# Altium PCB Circular PCB.PcbDoc (part 4 of 4)
Units mm, origin at the board's own origin, x right, y up, seen from the top; angles counter-clockwise.
Board outline 100 x 100 mm, 6 copper layers (Top Layer, GND (Top), X, Y, GND (Bot), Bottom Layer), stack 1.599 mm thick; 185 components, 119 nets, 581 pads, 159 vias.
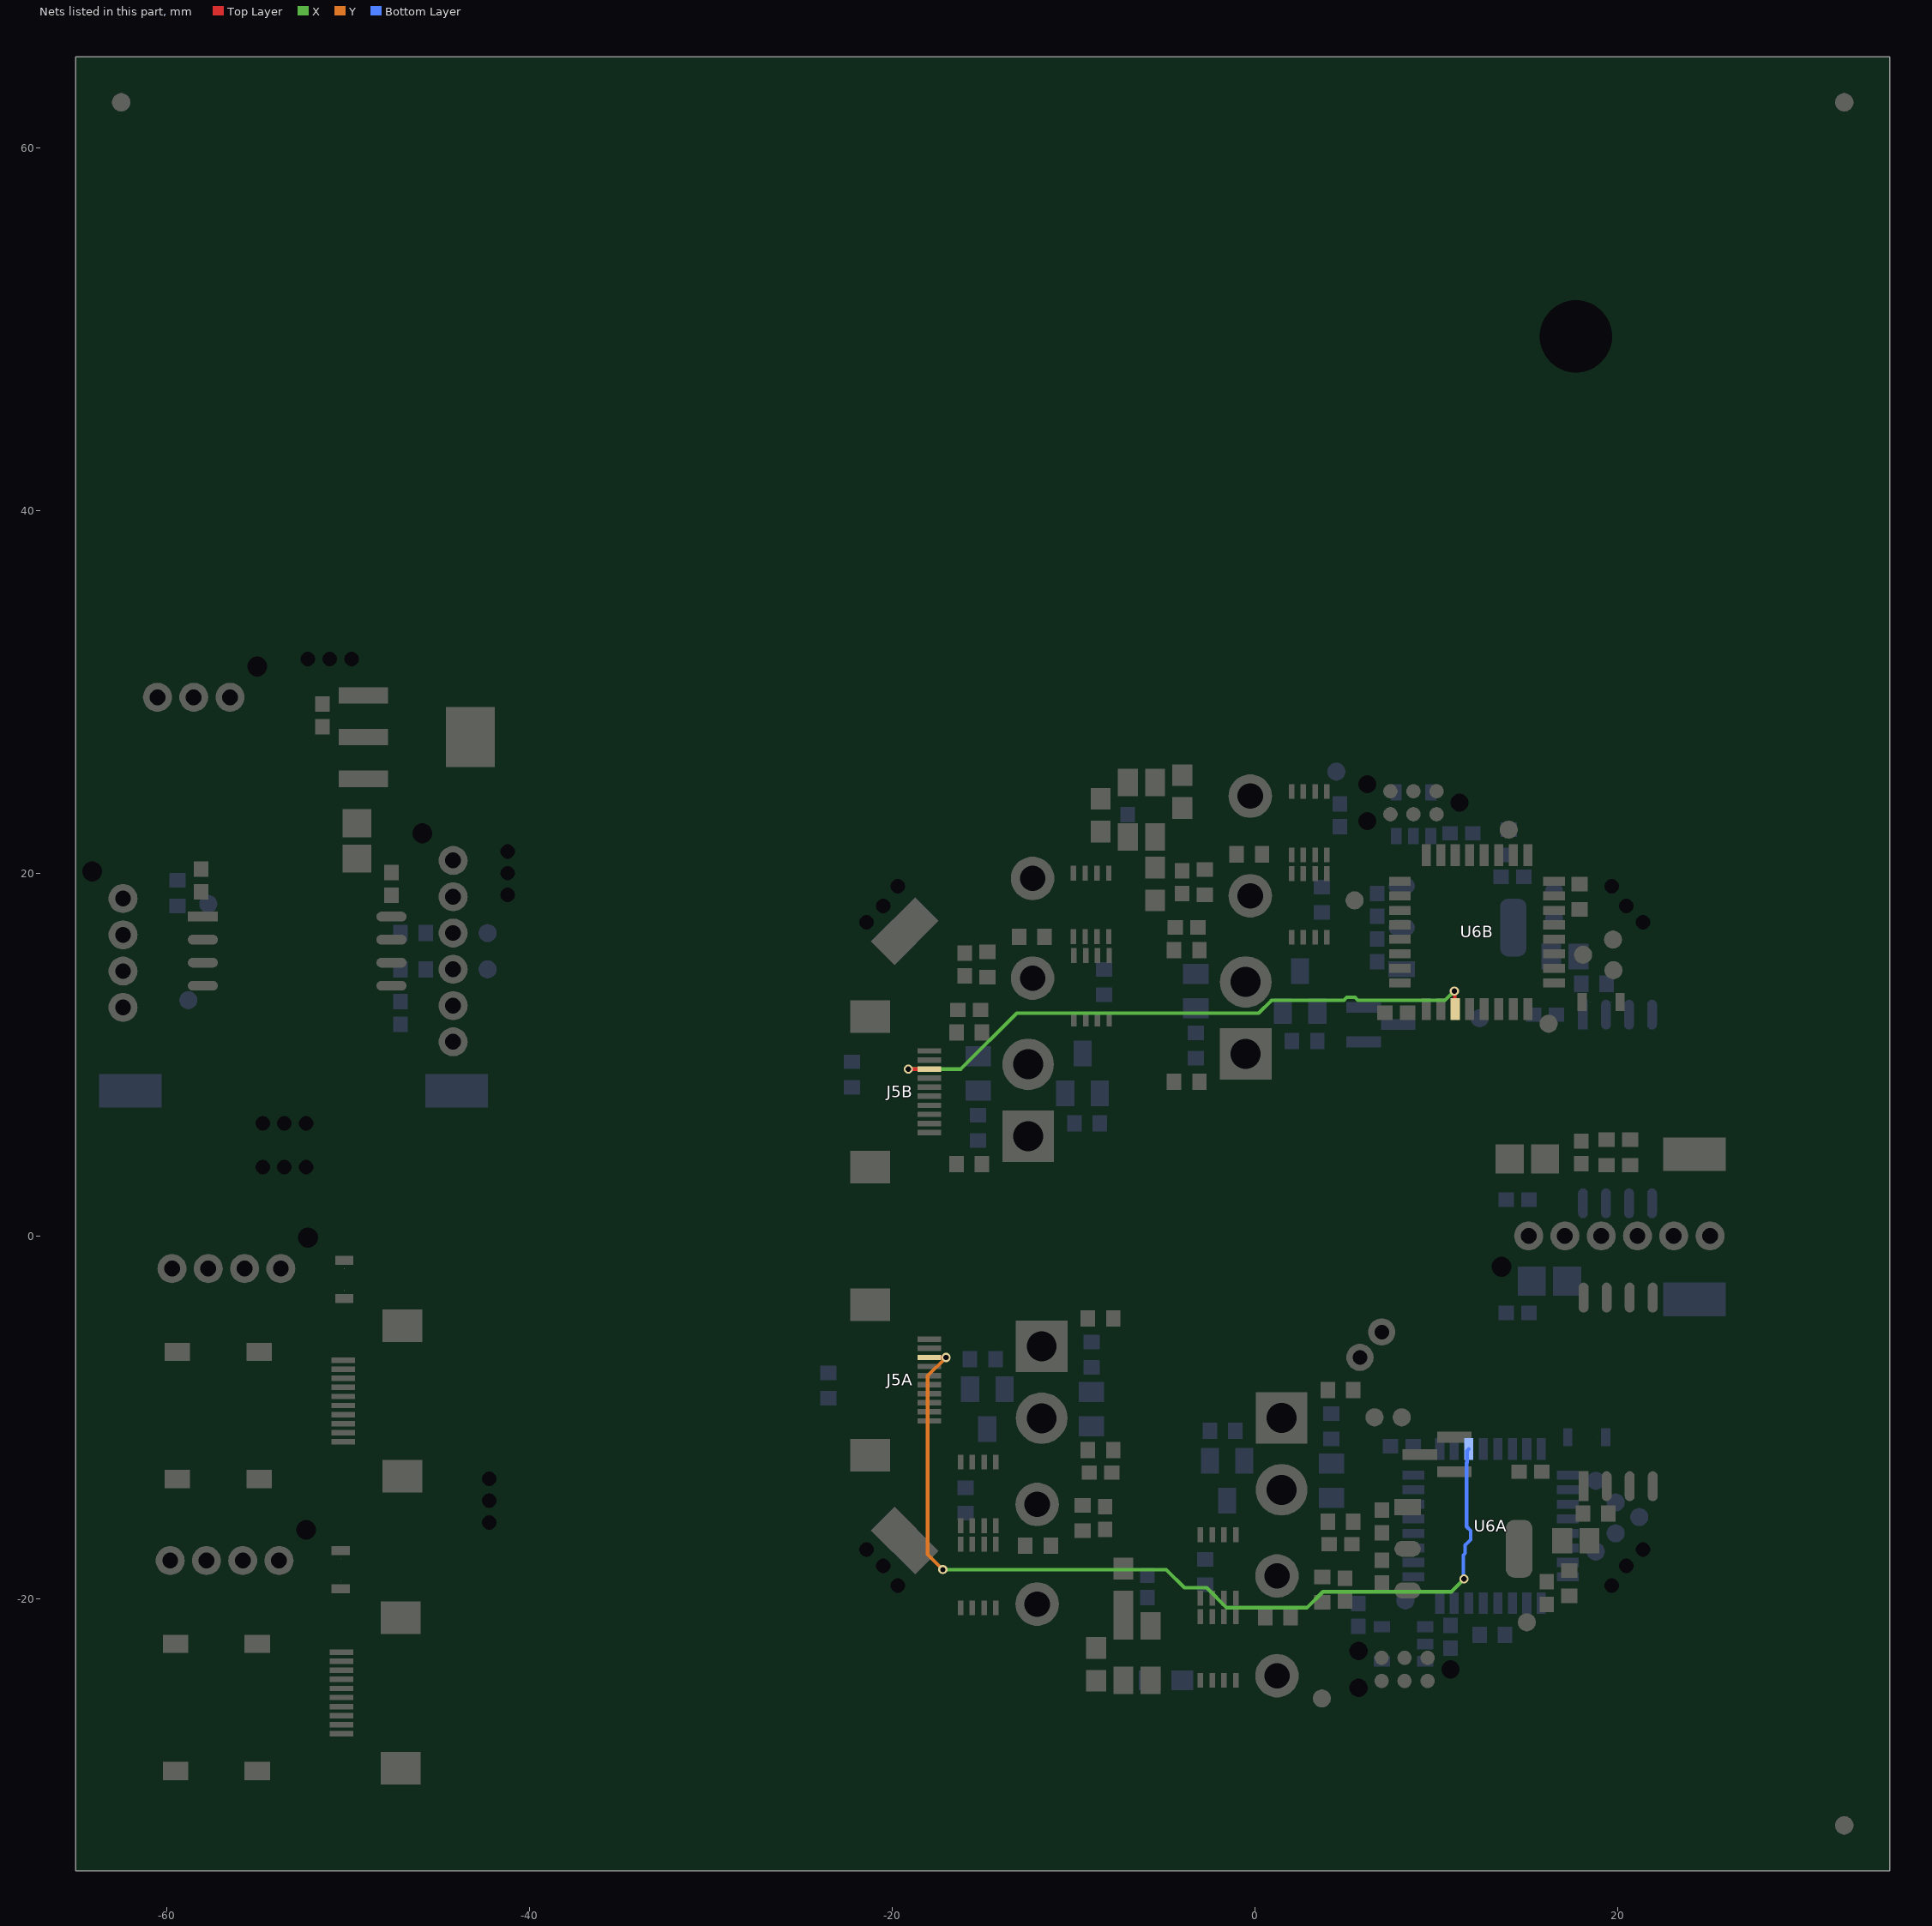
[diagram p7: the nets of this part, all layers, seen from the top]

## Via types
v1: diameter 0.5, hole 0.3, Top Layer to Bottom Layer, tented both sides, 155 vias
v2: diameter 0.5, hole 0.5, Top Layer to Bottom Layer, tented both sides, 2 vias
v3: diameter 0.8, hole 0.3, Top Layer to Bottom Layer, tented both sides, 2 vias

## Nets (pads, with @x,y where several pads share a name; then routed paths per layer and width w, separated by ;. In a path a pad name is that pad's centre, name@x,y a point inside that pad or via, vN(x,y) a via of type N, cw(c..) or ccw(c..) an arc to the next point about the centre after c; other vN are vias at no path point) (continued)
USART2_TXA: J5A.3 U6A.19 | length 51.2
  Top Layer w0.2: J5A.3@-17.95,-6.7 v1(-17.017,-6.7)
  X w0.2: v1(-17.2,-18.4) -4.876,-18.4 -3.876,-19.4 -2.649,-19.4 -1.549,-20.5 2.876,-20.5 3.757,-19.619 10.835,-19.619 v1(11.536,-18.918)
  Y w0.2: v1(-17.2,-18.4) -18.041,-17.559 -18.041,-7.724 v1(-17.017,-6.7)
  Bottom Layer w0.2: v1(11.536,-18.918) 11.5,-18.882 11.5,-17.599 11.6,-17.499 11.6,-17.049 11.9,-16.749 11.9,-16.251 11.676,-16.028 11.676,-12.512 11.7,-12.488 11.7,-11.85 U6A.19@11.8,-11.75
USART2_TXB: J5B.3 U6B.19 | length 34.2
  Top Layer w0.2: v1(-19.1,9.2) J5B.3@-17.95,9.2 ; v1(11.002,13.498) 11.025,13.475 11.025,12.525 U6B.19@11.05,12.5
  X w0.2: v1(-19.1,9.2) -16.2,9.2 -13.122,12.278 0.213,12.278 0.926,12.99 4.912,12.99 5.072,13.15 5.528,13.15 5.688,12.99 10.49,12.99 10.998,13.498 v1(11.002,13.498)
pads on no net: FID1.0 FID2.0 FID3.0 FID4.0 FID5.0 FID6.0 J2.11 J4A.0 J4B.0 J5A.0 J5B.0 J6.11 J7A.11 J7B.11 J8A.0 J8B.0 J9.11 J10.11 U1A.4 U1B.4 U6A.8 U6B.8 Z1.1 Z1.2 Z1.3 Z2.1 Z2.2 Z2.3 Z4.1 Z4.2 Z4.3 Z5.1 Z5.2 Z5.3 Z6.1 Z6.2 Z6.3

## Polygon pours and split planes (outlines as drawn)
GNDA on Top Layer "GNDA_L01_P046" (solid, remove dead copper, pour order 46): -28.75,-1.25 9.75,-1.25 9.75,-8.5 27,-8.5 27,-28 -28.75,-28
no net on Top Layer "NONET_L-01_P-001" (solid, pour order 90): -65,65 35,65 35,1 29,1 27,10 24,16 18,22 12,26 3,28 -4,28 -13,25 -20,20 -26,11 -28.614,2.301 -28,-4 -25,-13 -22,-18 -15,-24 -5,-28 8,-28 16,-23 24,-16 26.945,-10.231 28,-5 29,0 35,0 35,-35 -41,-35 -41,5 -40,5 -40,33 -65,33
NetJ3B_1 on Top Layer "NETJ3B_1_L01_P030" (solid, remove dead copper, pour order 30): -9.75,-8.09 -9.75,-3.79 -17.15,-3.79 -17.15,-13.275 -13.65,-13.275 -13.65,-8.09
ISO_GND on Top Layer "NONET_L-01_P-001" (solid, remove dead copper, pour order 84): -65,32 -41.066,32 -41.066,5.932 -52.6,5.932 -52.6,25.6 -65,25.6
GNDB on Top Layer "GNDB_L01_P056" (solid, remove dead copper, pour order 56): -28.75,1.25 -28.5,1 9.75,1 9.75,9.5 26.5,9.5 26.5,28.25 -29,28.25
GND on Top Layer "NONET_L-01_P-001" (solid, remove dead copper, pour order 73): -65,22.6 -55.1,22.6 -55.1,6 -65,6
NetJ4B_1 on Top Layer "NETJ4B_1_L01_P072" (solid, remove dead copper, pour order 72): -65,4 -42,4 -42,-14.5 -65,-14.5
NetJ4A_1 on Top Layer "NETJ4A_1_L01_P057" (solid, remove dead copper, pour order 57): -65,-14.75 -42,-14.75 -42,-35 -65,-35
ISO_GNDA on Top Layer "ISO_GNDA_L01_P028" (solid, remove dead copper, pour order 28): 12,7.5 12,-6.5 29.25,-6.5 29.25,7.5
NetJ3A_1 on Top Layer "NETJ3A_1_L01_P029" (solid, remove dead copper, pour order 29): 3.475,-12.037 3.475,-7.737 -3.925,-7.737 -3.925,-17.137 -0.425,-17.137 -0.425,-12.037
NetJ1D_1 on Top Layer "NETJ1D_1_L01_P044" (solid, remove dead copper, pour order 44): -7.52,22.3 -14.3,22.3 -14.3,18 -7.52,18
NetJ1B_1 on Top Layer "NETJ1B_1_L01_P038" (solid, remove dead copper, pour order 38): -16.73,-22.89 -9.95,-22.89 -9.95,-18.59 -16.73,-18.59
NetJ1A_1 on Top Layer "NETJ1A_1_L01_P036" (solid, remove dead copper, pour order 36): -3.505,-26.837 3.275,-26.837 3.275,-22.537 -3.505,-22.537
NetJ1C_1 on Top Layer "NETJ1C_1_L01_P042" (solid, remove dead copper, pour order 42): 4.48,26.84 -2.3,26.84 -2.3,22.54 4.48,22.54
NetJ3C_1 on Top Layer "NETJ3C_1_L01_P032" (solid, remove dead copper, pour order 32): -2.5,12.04 -2.5,7.74 4.9,7.74 4.9,17.14 1.4,17.14 1.4,12.04
NetJ3D_1 on Top Layer "NETJ3D_1_L01_P034" (solid, remove dead copper, pour order 34): -14.5,7.5 -14.5,3.2 -7.1,3.2 -7.1,12.6 -10.6,12.6 -10.6,7.5
no net on GND (Top) "NONET_L-01_P-001" (solid, pour order 85): -65,65 35,65 35,1 29,1 27,10 24,16 18,22 12,26 3,28 -4,28 -13,25 -20,20 -26,11 -28.614,2.301 -28,-4 -25,-13 -22,-18 -15,-24 -5,-28 8,-28 16,-23 24,-16 26.945,-10.231 28,-5 29,0 35,0 35,-35 -41,-35 -41,5 -40,5 -40,33 -65,33
ISO_GND on GND (Top) "NONET_L-01_P-001" (solid, remove dead copper, pour order 75): -65,32 -41.066,32 -41.066,5.932 -52.6,5.932 -52.6,25.6 -65,25.6
GNDA on GND (Top) "GNDA_L02_P033" (solid, remove dead copper, pour order 33): -28.75,-1.25 9.75,-1.25 9.75,-8.5 27,-8.5 27,-28 -28.75,-28
GND on GND (Top) "NONET_L-01_P-001" (solid, remove dead copper, pour order 74): -65,22.6 -55.1,22.6 -55.1,6 -65,6
NetJ4B_1 on GND (Top) "NETJ4B_1_L02_P059" (solid, remove dead copper, pour order 59): -65,4 -42,4 -42,-14.5 -65,-14.5
NetJ4A_1 on GND (Top) "NETJ4A_1_L02_P058" (solid, remove dead copper, pour order 58): -65,-14.75 -42,-14.75 -42,-35 -65,-35
ISO_GNDA on GND (Top) "ISO_GNDA_L02_P035" (solid, remove dead copper, pour order 35): 12,7.5 12,-6.5 29.25,-6.5 29.25,7.5
GNDB on GND (Top) "GNDB_L02_P031" (solid, remove dead copper, pour order 31): -28.75,1.25 -28.5,1 9.75,1 9.75,9.5 26.5,9.5 26.5,28.25 -29,28.25
no net on X "NONET_L-01_P-001" (solid, pour order 86): -65,65 35,65 35,1 29,1 27,10 24,16 18,22 12,26 3,28 -4,28 -13,25 -20,20 -26,11 -28.614,2.301 -28,-4 -25,-13 -22,-18 -15,-24 -5,-28 8,-28 16,-23 24,-16 26.945,-10.231 28,-5 29,0 35,0 35,-35 -41,-35 -41,5 -40,5 -40,33 -65,33
ISO_GND on X "NONET_L-01_P-001" (solid, remove dead copper, pour order 77): -65,32 -41.066,32 -41.066,5.932 -52.6,5.932 -52.6,25.6 -65,25.6
GNDA on X "GNDA_L03_P039" (solid, remove dead copper, pour order 39): -28.75,-1.25 9.75,-1.25 9.75,-8.5 27,-8.5 27,-28 -28.75,-28
GND on X "NONET_L-01_P-001" (solid, remove dead copper, pour order 76): -65,22.6 -55.1,22.6 -55.1,6 -65,6
NetJ4B_1 on X "NETJ4B_1_L03_P061" (solid, remove dead copper, pour order 61): -65,4 -42,4 -42,-14.5 -65,-14.5
NetJ4A_1 on X "NETJ4A_1_L03_P060" (solid, remove dead copper, pour order 60): -65,-14.75 -42,-14.75 -42,-35 -65,-35
ISO_GNDA on X "ISO_GNDA_L03_P041" (solid, remove dead copper, pour order 41): 12,7.5 12,-6.5 29.25,-6.5 29.25,7.5
GNDB on X "GNDB_L03_P037" (solid, remove dead copper, pour order 37): -28.75,1.25 -28.5,1 9.75,1 9.75,9.5 26.5,9.5 26.5,28.25 -29,28.25
no net on Y "NONET_L-01_P-001" (solid, pour order 87): -65,65 35,65 35,1 29,1 27,10 24,16 18,22 12,26 3,28 -4,28 -13,25 -20,20 -26,11 -28.614,2.301 -28,-4 -25,-13 -22,-18 -15,-24 -5,-28 8,-28 16,-23 24,-16 26.945,-10.231 28,-5 29,0 35,0 35,-35 -41,-35 -41,5 -40,5 -40,33 -65,33
ISO_GND on Y "NONET_L-01_P-001" (solid, remove dead copper, pour order 79): -65,32 -41.066,32 -41.066,5.932 -52.6,5.932 -52.6,25.6 -65,25.6
GNDA on Y "GNDA_L04_P045" (solid, remove dead copper, pour order 45): -28.75,-1.25 9.75,-1.25 9.75,-8.5 27,-8.5 27,-28 -28.75,-28
GND on Y "NONET_L-01_P-001" (solid, remove dead copper, pour order 78): -65,22.6 -55.1,22.6 -55.1,6 -65,6
NetJ4B_1 on Y "NETJ4B_1_L04_P063" (solid, remove dead copper, pour order 63): -65,4 -42,4 -42,-14.5 -65,-14.5
NetJ4A_1 on Y "NETJ4A_1_L04_P062" (solid, remove dead copper, pour order 62): -65,-14.75 -42,-14.75 -42,-35 -65,-35
ISO_GNDA on Y "ISO_GNDA_L04_P047" (solid, remove dead copper, pour order 47): 12,7.5 12,-6.5 29.25,-6.5 29.25,7.5
GNDB on Y "GNDB_L04_P043" (solid, remove dead copper, pour order 43): -28.75,1.25 -28.5,1 9.75,1 9.75,9.5 26.5,9.5 26.5,28.25 -29,28.25
no net on GND (Bot) "NONET_L-01_P-001" (solid, pour order 88): -65,65 35,65 35,1 29,1 27,10 24,16 18,22 12,26 3,28 -4,28 -13,25 -20,20 -26,11 -28.614,2.301 -28,-4 -25,-13 -22,-18 -15,-24 -5,-28 8,-28 16,-23 24,-16 26.945,-10.231 28,-5 29,0 35,0 35,-35 -41,-35 -41,5 -40,5 -40,33 -65,33
ISO_GND on GND (Bot) "NONET_L-01_P-001" (solid, remove dead copper, pour order 81): -65,32 -41.066,32 -41.066,5.932 -52.6,5.932 -52.6,25.6 -65,25.6
GNDA on GND (Bot) "GNDA_L05_P049" (solid, remove dead copper, pour order 49): -28.75,-1.25 9.75,-1.25 9.75,-8.5 27,-8.5 27,-28 -28.75,-28
GND on GND (Bot) "NONET_L-01_P-001" (solid, remove dead copper, pour order 80): -65,22.6 -55.1,22.6 -55.1,6 -65,6
NetJ4B_1 on GND (Bot) "NETJ4B_1_L05_P065" (solid, remove dead copper, pour order 65): -65,4 -42,4 -42,-14.5 -65,-14.5
NetJ4A_1 on GND (Bot) "NETJ4A_1_L05_P064" (solid, remove dead copper, pour order 64): -65,-14.75 -42,-14.75 -42,-35 -65,-35
ISO_GNDA on GND (Bot) "ISO_GNDA_L05_P050" (solid, remove dead copper, pour order 50): 12,7.5 12,-6.5 29.25,-6.5 29.25,7.5
GNDB on GND (Bot) "GNDB_L05_P048" (solid, remove dead copper, pour order 48): -28.75,1.25 -28.5,1 9.75,1 9.75,9.5 26.5,9.5 26.5,28.25 -29,28.25
GNDB on Bottom Layer "GNDB_L06_P051" (solid, remove dead copper, pour order 51): -28.75,1.25 -28.5,1 9.75,1 9.75,9.5 26.5,9.5 26.5,28.25 -29,28.25
no net on Bottom Layer "NONET_L-01_P-001" (solid, pour order 89): -65,65 35,65 35,1 29,1 27,10 24,16 18,22 12,26 3,28 -4,28 -13,25 -20,20 -26,11 -28.614,2.301 -28,-4 -25,-13 -22,-18 -15,-24 -5,-28 8,-28 16,-23 24,-16 26.945,-10.231 28,-5 29,0 35,0 35,-35 -41,-35 -41,5 -40,5 -40,33 -65,33
ISO_GND on Bottom Layer "NONET_L-01_P-001" (solid, remove dead copper, pour order 83): -65,32 -41.066,32 -41.066,5.932 -52.6,5.932 -52.6,25.6 -65,25.6
GND on Bottom Layer "NONET_L-01_P-001" (solid, remove dead copper, pour order 82): -65,22.6 -55.1,22.6 -55.1,6 -65,6
NetJ4B_1 on Bottom Layer "NETJ4B_1_L06_P055" (solid, remove dead copper, pour order 55): -65,4 -42,4 -42,-14.5 -65,-14.5
NetJ4A_1 on Bottom Layer "NETJ4A_1_L06_P054" (solid, remove dead copper, pour order 54): -65,-14.75 -42,-14.75 -42,-35 -65,-35
GNDA on Bottom Layer "GNDA_L06_P052" (solid, remove dead copper, pour order 52): -28.75,-1.25 9.75,-1.25 9.75,-8.5 27,-8.5 27,-28 -28.75,-28
ISO_GNDA on Bottom Layer "ISO_GNDA_L06_P053" (solid, remove dead copper, pour order 53): 12,7.5 12,-6.5 29.25,-6.5 29.25,7.5

## Keep-outs
Keep-Out Layer:
  circle w7.75: c0,0 r3.875
  lines w5: -65,24.1 -53.5,24.1 -53.5,6.3 ; -27.6,0 0,0 10.5,0 ; 26.9,8.5 10.5,8.5 10.5,-7.75 27.1,-7.75

## Other copper
Top Layer:
  region net SECONDARY_VBATT_1: 1.875,21.4 3.475,21.4 3.475,20.375 4.125,20.375 4.125,19.6 2.525,19.6 2.525,20.6 2.5,20.6 1.875,20.6
  region net SECONDARY_VBATT_2: -10.15,16.9 -8.55,16.9 -8.55,15.875 -7.9,15.875 -7.9,15.1 -9.5,15.1 -9.5,16.1 -9.525,16.1 -10.15,16.1
  region net PRIMARY_VBATT_1: -0.9,-21.4 -2.5,-21.4 -2.5,-20.375 -3.15,-20.375 -3.15,-19.6 -1.55,-19.6 -1.55,-20.6 -1.525,-20.6 -0.9,-20.6
  region net PRIMARY_VBATT_2: -14.125,-17.4 -15.725,-17.4 -15.725,-16.375 -16.375,-16.375 -16.375,-15.6 -14.775,-15.6 -14.775,-16.6 -14.75,-16.6 -14.125,-16.6
  text "1" at -36.8,-34 h1
GND (Top):
  text "2" at -35.8,-34 h1
X:
  text "3" at -34.5,-34 h1
Y:
  text "4" at -33.3,-34 h1
GND (Bot):
  text "5" at -32.1,-34 h1
Bottom Layer:
  text "6" at -30.1,-34 h1
Multi-Layer:
  pour cut-out: -37.2,-32.6 -29.7,-32.6 -29.7,-35 -29.8,-34.9 -37.2,-34.9

## Silkscreen, mask and mechanical layers (free items; w line width, h text height)
Top Overlay:
  drawing of 36 lines, arcs and shapes, not listed
  text "Direction AND Magnitude. / Oh Yeah!" at -62.5,51.815 h3
  text "Karman Delta" at -6.071,34.287 h3 r4.5
  text ".a_PcbPartNo" at -57.6,10.269 h2
  text "CAN ADAPTOR" at -60,6.859 h2
  text ".a_PcbPartNo" at -57.8,1.469 h2
  text "GNDA" at 8.2,-5.7 h1
  text "TP7A" at 7,-7.5 h1
  text "ANCILLARIES" at -59.002,-33.641 h2
Bottom Overlay:
  drawing of 52 lines, arcs and shapes, not listed
  text ".a_PcbPartNo" at 20.9,-8.231 h2
Top Solder:
  drawing of 2 lines, arcs and shapes, not listed
Bottom Solder:
  drawing of 2 lines, arcs and shapes, not listed
Board:
  the board outline again, w0.2
Isolations:
  circle w7.75: c0,0 r3.875
  lines w5: -65,24.1 -53.5,24.1 -53.5,6.3 ; -27.6,0 0,0 10.5,0 ; 26.9,8.5 10.5,8.5 10.5,-7.75 27.1,-7.75
Route Tool Path:
  circle w0.1: c0,0 r27.5
  circle w2: c0,0 r3.1
  pour cut-out: 24.5,-8.75 cw(c24.5,-7.75) 24.5,-6.75 26.75,-6.75 cw(c26.75,-7.75) 27.75,-7.75 cw(c26.75,-7.75) 26.75,-8.75
  lines w2: -65,5 -55.2,5 ; -65,33 -52.7,33 ; -51.8,5 -41,5 ; -49.3,33 -40,33 -40,21.7 ; -41,-35 -41,-16.3 ; -41,-12.9 -41,5 ; -40,18.3 -40,5 -41,5 ; -28,0 -24,0 ; -22.454,-17.559 cw(c0,0) -22.454,17.559 ; -20.156,-20.156 ccw(c0,0) 20.156,-20.156 ; -20.156,20.156 cw(c0,0) 20.156,20.156 ; 22.433,-17.586 ccw(c0,0) 22.452,17.562 ; 24.5,-7.75 26.75,-7.75 ; 24.5,8.5 26.75,8.5 ; -28,-1.5 -28,1.5 -24,1.5 -24,-1.5 -28,-1.5 ; 24.5,-9.25 24.5,-6.25 26.75,-6.25 26.75,-9.25 24.5,-9.25 ; 24.5,7 24.5,10 26.75,10 26.75,7 24.5,7
Top Assembly:
  drawing of 71 lines, arcs and shapes, not listed
  text "1" at -251.917,172.192 h3.81
  text "2" at -194.692,172.192 h3.81
  text "3" at -139.241,172.192 h3.81
  text "7" at 102.968,172.192 h3.81
  text "8" at 161.08,172.192 h3.81
  text "9" at 218.305,172.192 h3.81
  text "6" at 43.276,171.952 h3.81
  text "5" at -14.795,171.821 h3.81
  text "10" at 274.643,171.749 h3.81
  text "4" at -74.918,171.305 h3.81
  text "A" at 309.492,146.2 h3.81
  text "A" at -278.414,146.152 h3.81
  text "B" at 309.492,94.775 h3.81
  text "B" at -278.414,94.727 h3.81
  text "C" at 309.802,44.588 h3.81
  text "C" at -278.104,44.54 h3.81
  text "ASSEMBLY DRAWING NOTES: /  / 1. THE PCB ASSEMBLY SHALL BE COMPLIANT WITH THE ROHS2 DIRECTIVE 2011/65/EU. THIS SHALL INCLUDE, AT A MINIMUM, ALL THE CONSTITUENT MATERIALS AND ANY OTHER ADDITIVES THAT MAY BE INCLUDED OR TRANSFERRED INTO THE FINAL PRODUCT DURING THE MANUFACTURING PROCESS. THE SUPPLIER OF THIS PCB ASSEMBLY SHALL BE ABLE TO PROVIDE DOCUMENTATION UPON REQUEST DEMONSTRATING COMPLIANCE TO THE DIRECTIVE. /       / 2. ASSEMBLY SHALL BE ACCEPTABLE AND REJECTABLE AND INSPECTED TO IPC-A-610, CLASS 2. /  / 3. REWORK, REPAIR, OR MODIFICATIONS MUST COMPLY WITH IPC-7711 AND IPC-7721 CLASS 2. /  / 4. EXCEPTIONS TO NOTE 3: LIFTED LAND REPAIR, LAND REPAIR, LIFTED CONDUCTORS, AND PAD REPAIR IS NOT ACCEPTABLE. /  / 5. EACH LOT SHALL HAVE A CERTIFICATE OF COMPLIANCE TO CERTIFY THAT MATERIALS SPECIFIED ON THE BILL OF MATERIALS HAVE BEEN USED AND THAT THE ASSEMBLY HAS BEEN ASSEMBLED IN COMPLIANCE WITH THE AGREED QUALITY PLAN. /  / 6. THE ASSEMBLY SHALL BE LEGIBLY IDENTIFIED USING NON-CONDUCTIVE EPOXY INK OR A NON-CONDUCTIVE PERMANENT LABEL LOCATED IN THE AREA(S) INDICATED. THE IDENTIFIERS SHALL CONSIST OF THE MBI NUMBER (INCLUDING REVISION) AND THE BOARD'S SERIAL NUMBER (TO BE GENERATED BY THE ASSEMBLER). IF THIS ASSEMBLY DRAWING SHOWS THE LOCATION IS OFF THE BOARD, THE LABEL SHOULD BE PLACED ON A TAG THAT IS ATTACHED TO THE BOARD. /  / 7. COMPONENTS WITH PIN ONE DESIGNATOR OR POLARIZATION MARKINGS SHALL BE PLACED AS INDICATED ON THE ASSEMBLY DRAWING. /  / 8. APPROPRIATE ESD PRECAUTIONS SHALL BE USED WHILE BUILDING OR HANDLING THIS ASSEMBLY. /  / 9. COMPONENT LEADS IN PLATED-THROUGH HOLES SHALL BE TRIMMED TO EXTEND NO GREATER THAN 1.8 MM FROM THE PLATING SURFACE." at -240,5 h2
  text "D" at 309.802,-11.484 h3.81
  text "D" at -278.104,-11.532 h3.81
  text "E" at 309.492,-61.361 h3.81
  text "E" at -278.414,-61.409 h3.81
  text "F" at 310.111,-113.096 h3.81
  text "F" at -277.794,-113.144 h3.81
  text "G" at 309.802,-166.071 h3.81
  text "G" at -278.104,-166.119 h3.81
  text "H" at 309.492,-219.045 h3.81
  text "H" at -278.414,-219.093 h3.81
  text "P" at -214.85,-224.15 h2.33
  text "r" at -213.65,-224.15 h2.33
  text "o" at -212.9,-224.15 h2.33
  text "j" at -211.85,-224.15 h2.33
  text "e" at -211.25,-224.15 h2.33
  text "c" at -210.35,-224.15 h2.33
  text "t" at -209.45,-224.15 h2.33
  text "S" at -208.55,-224.15 h2.33
  text "u" at -207.35,-224.15 h2.33
  text "n" at -206.3,-224.15 h2.33
  text "r" at -205.25,-224.15 h2.33
  text "i" at -204.5,-224.15 h2.33
  text "d" at -203.9,-224.15 h2.33
  text "e" at -203,-224.15 h2.33
  text "Copyright" at 141.3,-224.424 h2.5
  text ".a_CopyrightDate" at 151.8,-224.424 h2.5
  text "Drawing No:" at 173.3,-224.924 h3
  text ".a_AssemDwgNo" at 188.8,-224.924 h4
  text "Title:" at 238.3,-224.924 h3
  text ".a_Title" at 245.3,-224.924 h4
  text "T" at -214.25,-226.4 h2.33
  text "h" at -213.05,-226.4 h2.33
  text "e" at -212,-226.4 h2.33
  text "D" at -210.65,-226.4 h2.33
  text "i" at -209.15,-226.4 h2.33
  text "a" at -208.55,-226.4 h2.33
  text "m" at -207.65,-226.4 h2.33
  text "o" at -206,-226.4 h2.33
  text "n" at -204.95,-226.4 h2.33
  text "d" at -203.9,-226.4 h2.33
  text "UNLESS OTHERWISE SPECIFIED / DIMENSONS AND TOLLERANCES ARE IN / mm AND APPLY TO FINISHED PART" at 85.293,-228.599 h1.52
  text "3" at -216.5,-228.8 h2.33
  text "2" at -215.45,-228.8 h2.33
  text "L" at -213.95,-228.8 h2.33
  text "e" at -212.75,-228.8 h2.33
  text "a" at -211.85,-228.8 h2.33
  text "v" at -210.95,-228.8 h2.33
  text "y" at -209.9,-228.8 h2.33
  text "g" at -208.85,-228.8 h2.33
  text "r" at -207.8,-228.8 h2.33
  text "e" at -207.05,-228.8 h2.33
  text "a" at -206.15,-228.8 h2.33
  text "v" at -205.25,-228.8 h2.33
  text "e" at -204.2,-228.8 h2.33
  text "R" at -202.85,-228.8 h2.33
  text "d" at -201.5,-228.8 h2.33
  text "Altium Designer" at 141.3,-229.424 h2.5
  text ".a_AltiumVer" at 157.8,-229.424 h2.5
  text "Changed by:" at 173.3,-229.424 h2.5
  text ".a_PcbRevAuthor" at 186.3,-229.424 h3
  text "Change Date:" at 208.8,-229.424 h2.5
  text ".a_PcbRevDate" at 222.3,-229.424 h2.5
  text "Top Assembly" at 238.2,-229.949 h4
  text "B" at -217.1,-231.05 h2.33
  text "r" at -215.75,-231.05 h2.33
  text "o" at -215,-231.05 h2.33
  text "o" at -213.95,-231.05 h2.33
  text "m" at -212.9,-231.05 h2.33
  text "h" at -211.25,-231.05 h2.33
  text "a" at -210.2,-231.05 h2.33
  text "l" at -209.3,-231.05 h2.33
  text "l" at -208.7,-231.05 h2.33
  text "," at -208.1,-231.05 h2.33
  text "S" at -207.2,-231.05 h2.33
  text "h" at -206,-231.05 h2.33
  text "e" at -204.95,-231.05 h2.33
  text "f" at -204.05,-231.05 h2.33
  text "f" at -203.3,-231.05 h2.33
  text "i" at -202.55,-231.05 h2.33
  text "e" at -201.95,-231.05 h2.33
  text "l" at -201.2,-231.05 h2.33
  text "d" at -200.75,-231.05 h2.33
  text "TOLLERANCES ON:" at 98.993,-231.299 h1.52
  text "U" at -215.45,-233.3 h2.33
  text "n" at -213.95,-233.3 h2.33
  text "i" at -212.9,-233.3 h2.33
  text "t" at -212.3,-233.3 h2.33
  text "e" at -211.7,-233.3 h2.33
  text "d" at -210.8,-233.3 h2.33
  text "K" at -209.45,-233.3 h2.33
  text "i" at -207.95,-233.3 h2.33
  text "n" at -207.35,-233.3 h2.33
  text "g" at -206.3,-233.3 h2.33
  text "d" at -205.25,-233.3 h2.33
  text "o" at -204.2,-233.3 h2.33
  text "m" at -203.15,-233.3 h2.33
  text "Size A2" at 141.3,-234.424 h2.5
  text "Change Reason:" at 173.3,-234.424 h2.5
  text ".a_PcbRevReason" at 189.8,-234.424 h2.5
  text "Sheet 1 of 2" at 208.8,-234.424 h2.5
  text "Variant: '.a_Variant'" at 238,-235 h4
  text "S" at -211.7,-235.55 h2.33
  text "3" at -210.5,-235.55 h2.33
  text "7" at -209,-235.55 h2.33
  text "R" at -207.95,-235.55 h2.33
  text "D" at -206.6,-235.55 h2.33
  text "1 PLACE DEC. / +/- 0.15" at 80.293,-236.199 h1.52
  text "ANGLES / +/- 0.5 DEG." at 121.593,-236.199 h1.52
  text "2 PLACE DEC. / +/- 0.05" at 100.993,-236.299 h1.52
  text "THIS DRAWING REMAINS THE PROPERTY OF PROJECT SUNRIDE. / COPYRIGHT FOR ALL PURPOSES IS VESTED IN PROJECT SUNRIDE. / THE REPRODUCTION OF THIS DRAWING IN WHOLE OR IN PART IS PROHIBITED WITHOUT EXPRESS CONSENT IN WRITING. THIS DESIGN IS OFFERED FOR USE ONLY WITH EQUIPMENT MANUFACTURED OR SPECIFICALLY RECOMMENDED BY PROJECT SUNRIDE. RIGHTS ARE RESERVED TO MAKE A CHARGE FOR THE USE OF THIS DESIGN OR ANY PART THEREOF AND SUCH RIGHT SHALL SUBSIST UNLESS AND UNTIL THE SAME SHALL BE EXPRESSLY WAIVED IN WRITING. ACCEPTANCE OF THIS DRAWING WILL BE CONSTRUED AS AN ACCEPTANCE OF THESE CONDITIONS." at -174.207,-238.999 h1.52
  text "1" at -251.893,-240.91 h3.81
  text "2" at -194.668,-240.91 h3.81
  text "3" at -139.217,-240.91 h3.81
  text "7" at 102.992,-240.91 h3.81
  text "8" at 161.104,-240.91 h3.81
  text "9" at 218.329,-240.91 h3.81
  text "6" at 43.3,-241.15 h3.81
  text "5" at -14.771,-241.282 h3.81
  text "10" at 274.667,-241.353 h3.81
  text "4" at -74.894,-241.797 h3.81
Bottom Assembly:
  drawing of 72 lines, arcs and shapes, not listed
  text "9" at -184.307,172.194 h3.81
  text "8" at -127.082,172.194 h3.81
  text "7" at -68.97,172.194 h3.81
  text "3" at 173.239,172.194 h3.81
  text "2" at 228.69,172.194 h3.81
  text "1" at 285.915,172.194 h3.81
  text "6" at -9.279,171.954 h3.81
  text "5" at 48.792,171.823 h3.81
  text "10" at -240.645,171.751 h3.81
  text "4" at 108.916,171.307 h3.81
  text "A" at -275.494,146.202 h3.81
  text "A" at 312.412,146.154 h3.81
  text "B" at -275.494,94.777 h3.81
  text "B" at 312.412,94.729 h3.81
  text "C" at -275.804,44.59 h3.81
  text "C" at 312.102,44.542 h3.81
  text "ASSEMBLY DRAWING NOTES: /  / 1. THE PCB ASSEMBLY SHALL BE COMPLIANT WITH THE ROHS2 DIRECTIVE 2011/65/EU. THIS SHALL INCLUDE, AT A MINIMUM, ALL THE CONSTITUENT MATERIALS AND ANY OTHER ADDITIVES THAT MAY BE INCLUDED OR TRANSFERRED INTO THE FINAL PRODUCT DURING THE MANUFACTURING PROCESS. THE SUPPLIER OF THIS PCB ASSEMBLY SHALL BE ABLE TO PROVIDE DOCUMENTATION UPON REQUEST DEMONSTRATING COMPLIANCE TO THE DIRECTIVE. /       / 2. ASSEMBLY SHALL BE ACCEPTABLE AND REJECTABLE AND INSPECTED TO IPC-A-610, CLASS 2. /  / 3. REWORK, REPAIR, OR MODIFICATIONS MUST COMPLY WITH IPC-7711 AND IPC-7721 CLASS 2. /  / 4. EXCEPTIONS TO NOTE 3: LIFTED LAND REPAIR, LAND REPAIR, LIFTED CONDUCTORS, AND PAD REPAIR IS NOT ACCEPTABLE. /  / 5. EACH LOT SHALL HAVE A CERTIFICATE OF COMPLIANCE TO CERTIFY THAT MATERIALS SPECIFIED ON THE BILL OF MATERIALS HAVE BEEN USED AND THAT THE ASSEMBLY HAS BEEN ASSEMBLED IN COMPLIANCE WITH THE AGREED QUALITY PLAN. /  / 6. THE ASSEMBLY SHALL BE LEGIBLY IDENTIFIED USING NON-CONDUCTIVE EPOXY INK OR A NON-CONDUCTIVE PERMANENT LABEL LOCATED IN THE AREA(S) INDICATED. THE IDENTIFIERS SHALL CONSIST OF THE MBI NUMBER (INCLUDING REVISION) AND THE BOARD'S SERIAL NUMBER (TO BE GENERATED BY THE ASSEMBLER). IF THIS ASSEMBLY DRAWING SHOWS THE LOCATION IS OFF THE BOARD, THE LABEL SHOULD BE PLACED ON A TAG THAT IS ATTACHED TO THE BOARD. /  / 7. COMPONENTS WITH PIN ONE DESIGNATOR OR POLARIZATION MARKINGS SHALL BE PLACED AS INDICATED ON THE ASSEMBLY DRAWING. /  / 8. APPROPRIATE ESD PRECAUTIONS SHALL BE USED WHILE BUILDING OR HANDLING THIS ASSEMBLY. /  / 9. COMPONENT LEADS IN PLATED-THROUGH HOLES SHALL BE TRIMMED TO EXTEND NO GREATER THAN 1.8 MM FROM THE PLATING SURFACE." at 273.998,5.002 h2
  text "D" at -275.804,-11.482 h3.81
  text "D" at 312.102,-11.53 h3.81
  text "E" at -275.494,-61.359 h3.81
  text "E" at 312.412,-61.407 h3.81
  text "Place Serial Number QR code label where indicated. / QR code format = xxxxxx-yyyyyy / Where xxxxxx is the works order number, and yyyyyy is an incrementing item number starting from 1. / Text below QR code should show the QR code data, along with the Master Build Instruction number and revision." at 0.7,-83.6 h2
  text "F" at -276.114,-113.094 h3.81
  text "F" at 311.792,-113.142 h3.81
  text "G" at -275.804,-166.069 h3.81
  text "G" at 312.102,-166.117 h3.81
  text "H" at -275.494,-219.043 h3.81
  text "H" at 312.412,-219.091 h3.81
  text "e" at 239,-224.15 h2.33
  text "d" at 239.9,-224.15 h2.33
  text "i" at 240.5,-224.15 h2.33
  text "r" at 241.25,-224.15 h2.33
  text "n" at 242.3,-224.15 h2.33
  text "u" at 243.35,-224.15 h2.33
  text "S" at 244.55,-224.15 h2.33
  text "t" at 245.45,-224.15 h2.33
  text "c" at 246.35,-224.15 h2.33
  text "e" at 247.25,-224.15 h2.33
  text "j" at 247.85,-224.15 h2.33
  text "o" at 248.9,-224.15 h2.33
  text "r" at 249.65,-224.15 h2.33
  text "P" at 250.85,-224.15 h2.33
  text ".a_CopyrightDate" at -117.802,-224.422 h2.5
  text "Copyright" at -107.302,-224.422 h2.5
  text ".a_Title" at -211.302,-224.922 h4
  text "Title:" at -204.302,-224.922 h3
  text ".a_AssemDwgNo" at -154.802,-224.922 h4
  text "Drawing No:" at -139.302,-224.922 h3
  text "d" at 239.9,-226.4 h2.33
  text "n" at 240.95,-226.4 h2.33
  text "o" at 242,-226.4 h2.33
  text "m" at 243.65,-226.4 h2.33
  text "a" at 244.55,-226.4 h2.33
  text "i" at 245.15,-226.4 h2.33
  text "D" at 246.65,-226.4 h2.33
  text "e" at 248,-226.4 h2.33
  text "h" at 249.05,-226.4 h2.33
  text "T" at 250.25,-226.4 h2.33
  text "UNLESS OTHERWISE SPECIFIED / DIMENSONS AND TOLLERANCES ARE IN / mm AND APPLY TO FINISHED PART" at -51.296,-228.597 h1.52
  text "d" at 237.5,-228.8 h2.33
  text "R" at 238.85,-228.8 h2.33
  text "e" at 240.2,-228.8 h2.33
  text "v" at 241.25,-228.8 h2.33
  text "a" at 242.15,-228.8 h2.33
  text "e" at 243.05,-228.8 h2.33
  text "r" at 243.8,-228.8 h2.33
  text "g" at 244.85,-228.8 h2.33
  text "y" at 245.9,-228.8 h2.33
  text "v" at 246.95,-228.8 h2.33
  text "a" at 247.85,-228.8 h2.33
  text "e" at 248.75,-228.8 h2.33
  text "L" at 249.95,-228.8 h2.33
  text "2" at 251.45,-228.8 h2.33
  text "3" at 252.5,-228.8 h2.33
  text ".a_PcbRevDate" at -188.302,-229.422 h2.5
  text "Change Date:" at -174.802,-229.422 h2.5
  text ".a_PcbRevAuthor" at -152.302,-229.422 h3
  text "Changed by:" at -139.302,-229.422 h2.5
  text ".a_AltiumVer" at -123.802,-229.422 h2.5
  text "Altium Designer" at -107.302,-229.422 h2.5
  text "Bottom Assembly" at -204.202,-229.947 h4
  text "d" at 236.75,-231.05 h2.33
  text "l" at 237.2,-231.05 h2.33
  text "e" at 237.95,-231.05 h2.33
  text "i" at 238.55,-231.05 h2.33
  text "f" at 239.3,-231.05 h2.33
  text "f" at 240.05,-231.05 h2.33
  text "e" at 240.95,-231.05 h2.33
  text "h" at 242,-231.05 h2.33
  text "S" at 243.2,-231.05 h2.33
  text "," at 244.1,-231.05 h2.33
  text "l" at 244.7,-231.05 h2.33
  text "l" at 245.3,-231.05 h2.33
  text "a" at 246.2,-231.05 h2.33
  text "h" at 247.25,-231.05 h2.33
  text "m" at 248.9,-231.05 h2.33
  text "o" at 249.95,-231.05 h2.33
  text "o" at 251,-231.05 h2.33
  text "r" at 251.75,-231.05 h2.33
  text "B" at 253.1,-231.05 h2.33
  text "TOLLERANCES ON:" at -64.995,-231.297 h1.52
  text "m" at 239.15,-233.3 h2.33
  text "o" at 240.2,-233.3 h2.33
  text "d" at 241.25,-233.3 h2.33
  text "g" at 242.3,-233.3 h2.33
  text "n" at 243.35,-233.3 h2.33
  text "i" at 243.95,-233.3 h2.33
  text "K" at 245.45,-233.3 h2.33
  text "d" at 246.8,-233.3 h2.33
  text "e" at 247.7,-233.3 h2.33
  text "t" at 248.3,-233.3 h2.33
  text "i" at 248.9,-233.3 h2.33
  text "n" at 249.95,-233.3 h2.33
  text "U" at 251.45,-233.3 h2.33
  text "Sheet 2 of 2" at -174.802,-234.422 h2.5
  text ".a_PcbRevReason" at -155.802,-234.422 h2.5
  text "Change Reason:" at -139.302,-234.422 h2.5
  text "Size A2" at -107.302,-234.422 h2.5
  text "Variant: '.a_Variant'" at -204.002,-234.998 h4
  text "D" at 242.6,-235.55 h2.33
  text "R" at 243.95,-235.55 h2.33
  text "7" at 245,-235.55 h2.33
  text "3" at 246.5,-235.55 h2.33
  text "S" at 247.7,-235.55 h2.33
  text "ANGLES / +/- 0.5 DEG." at -87.595,-236.197 h1.52
  text "1 PLACE DEC. / +/- 0.15" at -46.296,-236.197 h1.52
  text "2 PLACE DEC. / +/- 0.05" at -66.995,-236.297 h1.52
  text "THIS DRAWING REMAINS THE PROPERTY OF PROJECT SUNRIDE. / COPYRIGHT FOR ALL PURPOSES IS VESTED IN PROJECT SUNRIDE. / THE REPRODUCTION OF THIS DRAWING IN WHOLE OR IN PART IS PROHIBITED WITHOUT EXPRESS CONSENT IN WRITING. THIS DESIGN IS OFFERED FOR USE ONLY WITH EQUIPMENT MANUFACTURED OR SPECIFICALLY RECOMMENDED BY PROJECT SUNRIDE. RIGHTS ARE RESERVED TO MAKE A CHARGE FOR THE USE OF THIS DESIGN OR ANY PART THEREOF AND SUCH RIGHT SHALL SUBSIST UNLESS AND UNTIL THE SAME SHALL BE EXPRESSLY WAIVED IN WRITING. ACCEPTANCE OF THIS DRAWING WILL BE CONSTRUED AS AN ACCEPTANCE OF THESE CONDITIONS." at 208.205,-238.997 h1.52
  text "9" at -184.331,-240.908 h3.81
  text "8" at -127.106,-240.908 h3.81
  text "7" at -68.994,-240.908 h3.81
  text "3" at 173.215,-240.908 h3.81
  text "2" at 228.666,-240.908 h3.81
  text "1" at 285.891,-240.908 h3.81
  text "6" at -9.302,-241.148 h3.81
  text "5" at 48.769,-241.28 h3.81
  text "10" at -240.669,-241.351 h3.81
  text "4" at 108.892,-241.795 h3.81
Drill Drawing:
  drawing of 614 lines, arcs and shapes, not listed
  text "1" at -252.01,172.191 h3.81
  text "2" at -194.785,172.191 h3.81
  text "3" at -139.334,172.191 h3.81
  text "7" at 102.875,172.191 h3.81
  text "8" at 160.987,172.191 h3.81
  text "9" at 218.212,172.191 h3.81
  text "6" at 43.183,171.951 h3.81
  text "5" at -14.888,171.819 h3.81
  text "10" at 274.55,171.748 h3.81
  text "4" at -75.011,171.304 h3.81
  text "A" at 309.399,146.199 h3.81
  text "A" at -278.507,146.151 h3.81
  text "B" at 309.399,94.773 h3.81
  text "B" at -278.507,94.725 h3.81
  text "PLEASE PLACE THE UL LOGO, ETC. IN THIS AREA ON THE BOTTOM SILKSCREEN LAYER" at -66,73.4 h2
  text "C" at 309.708,44.587 h3.81
  text "C" at -278.197,44.539 h3.81
  text "ENSURE BOARD CUTOUTS ARE INCORPORATED - SEE ROUTE TOOL PATH LAYER" at 55.75,0.075 h2
  text "PLACE PCB SERIAL NUMBER QR CODE HERE ON TOP SILKSCREEN" at 56.05,-10.325 h2
  text "D" at 309.708,-11.486 h3.81
  text "D" at -278.197,-11.534 h3.81
  text "PLEASE PLACE THE ELECTRICAL CHECK MARK (BBT) IN THIS AREA ON THE UNDERSIDE" at 51.6,-36.9 h2
  text "E" at 309.399,-61.362 h3.81
  text "E" at -278.507,-61.41 h3.81
  text "1.      ROHS / THE PCB SHALL BE COMPLIANT WITH THE EU ROHS2 DIRECTIVE 2011/65/EU. THIS SHALL INCLUDE, AT A MINIMUM, ALL THE CONSTITUENT MATERIALS AND ANY OTHER ADDITIVES THAT MAY BE INCLUDED OR TRANSFERRED INTO THE FINAL PRODUCT DURING THE MANUFACTURING PROCESS. THE SUPPLIER OF THIS PCB SHALL BE ABLE TO PROVIDE DOCUMENTATION UPON REQUEST DEMONSTRATING COMPLIANCE TO THE DIRECTIVE. /       / 2.      FLAMMABILITY / THE PCB MATERIALS AND CONSTRUCTION MUST MEET UL94V-0. /  / 3.      MATERIALS / SEE THE BOARD STACKUP TABLE FOR DETAILS.  / FINISHED PCB THICKNESS TO BE WITHIN +/- 10% OF THE TOTAL OF THE STACKUP TABLE. /  / 4.      IMPEDANCE CONTROL / NOT REQUIRED. /  / 5.      PLATING / COPPER THICKNESSES STATED IN STACKUP TABLE ARE FINISHED PLATED WEIGHTS. / HOLES TO BE PLATED THRU 0.025 MM MINIMUM COPPER. ALL VIAS TO BE RESIN FILLED & PLATED SHUT. /  / 6.      LINE THICKNESS / FINISHED LINE THICKNESS TO BE WITHIN +/- 10% OF GERBER DATA. /  / 7.      DRILLING / SEE DRILL TABLE. SIZES SHOWN ARE FINISHED HOLE SIZES. / MINIMUM ANNULAR RING REQUIREMENT IS 0.05 MM. / DRILL HOLE TANGENCY IS ACCEPTABLE BUT HOLE BREAK OUT SHALL NOT BE ACCEPTABLE. / HOLE LOCATION AND TOLERANCES ARE TO BE +/- 0.076 MM FROM DATUM (0.0-0.0). /  / 8.      QUALITY / BOARDS SHALL BE ACCEPTABLE AND REJECTABLE PER IPC-A-600 CLASS 2. /  / 9.      SOLDER MASK / CONSTRUCTION TO BE SOLDERMASK OVER BARE COPPER (SMOBC), USING LIQUID PHOTO-IMAGEABLE (LPI) SOLDERMASK TO MEET QUALIFICATIONS OF IPC-SM-840. / SOLDER MASK TO BE GREEN UNLESS OTHERWISE SPECIFIED ON PO. /  / 10.     SILKSCREEN LEGEND / WHITE. /  / 11.     FINISH / IMMERSION GOLD OVER ELECTROLESS NICKEL (ENIG). / COVERAGE AND SOLDERABILITY SHALL MEET IPC-4552. /  / 12.     MARKING / UL LOGO, UL94 V-0 TEXT, MANUFACTURER CODE AND DATE LEGEND TO BE ADDED IN POSITION INDICATED. /  / 13.     ROUTING / PCB WILL HAVE ROUTED EDGE; V-SCORING NOT ALLOWED.  / MINIMUM ROUTING RADIUS TO BE 0.75 MM. / BOARD ROUTING TOLERANCE TO BE +/- 0.2 MM. /  / 14.     ELECTRICAL TESTING / BARE BOARDS SHALL BE 100% ELECTRICAL TESTED FOR RESISTANCE AT 100 VOLTS MINIMUM, AND FOR AND CONTINUITY USING GERBER GENERATED NET LIST DATA.  / BBT (BARE BOARD TESTED) TO BE ADDED BY THE MANUFACTURER IN AREA INDICATED TO CERTIFY THAT THE BOARDS HAVE BEEN TESTED. /  / 15.     PACKAGING / BOARD TO BE VACUUM PACKED, SHIPPED AND IDENTIFIED WITH PART NUMBER, REVISION, AND DATE CODE MARKED ON THE PACKAGING. /  / 16.     PANELISATION / PANEL SIZE, BOARDS PER PANEL AND TOOLING RAILS / HOLES TO BE SPECIFIED BY PCB ASSEMBLER ON PURCHASE ORDER. /  / 17.     SOLDER PASTE STENCIL DATA / PLEASE SEND BACK TO US THE STEP AND REPEATED DATA FOR THE SOLDER PASTE STENCIL." at -260.1,-74 h2
  text "F" at 310.018,-113.097 h3.81
  text "F" at -277.888,-113.145 h3.81
  text "LAYER STACK TABLE FOR FINISHED BOARD THICKNESSES" at 177.7,-131 h2.5
  text "Layer" at 174.269,-135.682 h1.52
  text "Name" at 184.68,-135.682 h1.52
  text "Material" at 218.453,-135.682 h1.52
  text "Thickness" at 240.291,-135.682 h1.52
  text "Constant" at 256.796,-135.682 h1.52
  text "Board Layer Stack" at 271.271,-135.682 h1.52
  text "Top Overlay" at 184.68,-138.73 h1.52
  text "Top Solder" at 184.68,-141.778 h1.52
  text "Solder Resist" at 218.453,-141.778 h1.52
  text "0.010mm" at 240.291,-141.778 h1.52
  text "3.5" at 256.796,-141.778 h1.52
  text "Symbol" at -130.524,-142.756 h1.83
  text "Count" at -117.674,-142.756 h1.83
  text "Hole Size" at -102.438,-142.756 h1.83
  text "Plated" at -73.237,-142.756 h1.83
  text "Hole Type" at -60.388,-142.756 h1.83
  text "Drill Layer Pair" at -41.749,-142.756 h1.83
  text "Via/Pad" at -3.66,-142.756 h1.83
  text "Pad Shape" at 11.322,-142.756 h1.83
  text "Template" at 30.265,-142.756 h1.83
  text "Description" at 49.31,-142.756 h1.83
  text "Hole Tolerance (+)" at 70.995,-142.756 h1.83
  text "Hole Tolerance (-)" at 104.869,-142.756 h1.83
  text "Top Surface Finish" at 184.68,-144.826 h1.52
  text "Nickel, Gold" at 218.453,-144.826 h1.52
  text "0.002mm" at 240.291,-144.826 h1.52
  text "1" at -117.674,-146.566 h1.52
  text "4.000mm (157.48mil)" at -102.438,-146.566 h1.52
  text "PTH" at -73.237,-146.566 h1.52
  text "Round" at -60.388,-146.566 h1.52
  text "Top Layer - Bottom Layer" at -41.749,-146.566 h1.52
  text "Pad" at -3.66,-146.566 h1.52
  text "Rounded" at 11.322,-146.566 h1.52
  text "c0h400" at 30.265,-146.566 h1.52
  text "1" at 174.269,-147.874 h1.52
  text "Top Layer" at 184.68,-147.874 h1.52
  text "0.070mm" at 240.291,-147.874 h1.52
  text "2" at -117.674,-150.376 h1.52
  text "0.500mm (19.69mil)" at -102.438,-150.376 h1.52
  text "PTH" at -73.237,-150.376 h1.52
  text "Round" at -60.388,-150.376 h1.52
  text "Top Layer - Bottom Layer" at -41.749,-150.376 h1.52
  text "Via" at -3.66,-150.376 h1.52
  text "Rounded" at 11.322,-150.376 h1.52
  text "v50h50m0mx0" at 30.265,-150.376 h1.52
  text "Dielectric 2" at 184.68,-150.922 h1.52
  text "3313*1" at 218.453,-150.922 h1.52
  text "0.099mm" at 240.291,-150.922 h1.52
  text "4.1" at 256.796,-150.922 h1.52
  text "2" at 174.269,-153.97 h1.52
  text "GND (Top)" at 184.68,-153.97 h1.52
  text "CF-004" at 218.453,-153.97 h1.52
  text "0.015mm" at 240.291,-153.97 h1.52
  text "6" at -117.674,-154.186 h1.52
  text "0.995mm (39.17mil)" at -102.438,-154.186 h1.52
  text "PTH" at -73.237,-154.186 h1.52
  text "Round" at -60.388,-154.186 h1.52
  text "Top Layer - Bottom Layer" at -41.749,-154.186 h1.52
  text "Pad" at -3.66,-154.186 h1.52
  text "Rounded" at 11.322,-154.186 h1.52
  text "c90h100" at 30.265,-154.186 h1.52
  text "Dielectric 4" at 184.68,-157.018 h1.52
  text "Core-009" at 218.453,-157.018 h1.52
  text "0.550mm" at 240.291,-157.018 h1.52
  text "4.5" at 256.796,-157.018 h1.52
  text "6" at -117.674,-157.996 h1.52
  text "1.100mm (43.31mil)" at -102.438,-157.996 h1.52
  text "NPTH" at -73.237,-157.996 h1.52
  text "Round" at -60.388,-157.996 h1.52
  text "Top Layer - Bottom Layer" at -41.749,-157.996 h1.52
  text "Pad" at -3.66,-157.996 h1.52
  text "Rounded" at 11.322,-157.996 h1.52
  text "c0hn110" at 30.265,-157.996 h1.52
  text "3" at 174.269,-160.066 h1.52
  text "X" at 184.68,-160.066 h1.52
  text "CF-004" at 218.453,-160.066 h1.52
  text "0.015mm" at 240.291,-160.066 h1.52
  text "8" at -117.674,-161.806 h1.52
  text "1.400mm (55.12mil)" at -102.438,-161.806 h1.52
  text "PTH" at -73.237,-161.806 h1.52
  text "Round" at -60.388,-161.806 h1.52
  text "Top Layer - Bottom Layer" at -41.749,-161.806 h1.52
  text "Pad" at -3.66,-161.806 h1.52
  text "Rounded" at 11.322,-161.806 h1.52
  text "c240h140" at 30.265,-161.806 h1.52
  text "Dielectric 1" at 184.68,-163.114 h1.52
  text "3313*1" at 218.453,-163.114 h1.52
  text "0.099mm" at 240.291,-163.114 h1.52
  text "4.8" at 256.796,-163.114 h1.52
  text "8" at -117.674,-165.616 h1.52
  text "1.650mm (64.96mil)" at -102.438,-165.616 h1.52
  text "PTH" at -73.237,-165.616 h1.52
  text "Round" at -60.388,-165.616 h1.52
  text "Top Layer - Bottom Layer" at -41.749,-165.616 h1.52
  text "Pad" at -3.66,-165.616 h1.52
  text "(Mixed)" at 11.322,-165.616 h1.52
  text "(Mixed)" at 30.265,-165.616 h1.52
  text "G" at 309.708,-166.072 h3.81
  text "G" at -278.197,-166.12 h3.81
  text "4" at 174.269,-166.162 h1.52
  text "Y" at 184.68,-166.162 h1.52
  text "CF-004" at 218.453,-166.162 h1.52
  text "0.015mm" at 240.291,-166.162 h1.52
  text "Dielectric 5" at 184.68,-169.21 h1.52
  text "Core-009" at 218.453,-169.21 h1.52
  text "0.550mm" at 240.291,-169.21 h1.52
  text "4.5" at 256.796,-169.21 h1.52
  text "14" at -117.674,-169.426 h1.52
  text "0.800mm (31.50mil)" at -102.438,-169.426 h1.52
  text "PTH" at -73.237,-169.426 h1.52
  text "Round" at -60.388,-169.426 h1.52
  text "Top Layer - Bottom Layer" at -41.749,-169.426 h1.52
  text "Pad" at -3.66,-169.426 h1.52
  text "Rounded" at 11.322,-169.426 h1.52
  text "(Mixed)" at 30.265,-169.426 h1.52
  text "5" at 174.269,-172.258 h1.52
  text "GND (Bot)" at 184.68,-172.258 h1.52
  text "CF-004" at 218.453,-172.258 h1.52
  text "0.015mm" at 240.291,-172.258 h1.52
  text "15" at -117.674,-173.236 h1.52
  text "0.800mm (31.50mil)" at -102.438,-173.236 h1.52
  text "NPTH" at -73.237,-173.236 h1.52
  text "Round" at -60.388,-173.236 h1.52
  text "Top Layer - Bottom Layer" at -41.749,-173.236 h1.52
  text "Pad" at -3.66,-173.236 h1.52
  text "Rounded" at 11.322,-173.236 h1.52
  text "c0hn80" at 30.265,-173.236 h1.52
  text "Dielectric 3" at 184.68,-175.306 h1.52
  text "3313*1" at 218.453,-175.306 h1.52
  text "0.099mm" at 240.291,-175.306 h1.52
  text "4.1" at 256.796,-175.306 h1.52
  text "27" at -117.674,-177.046 h1.52
  text "0.870mm (34.25mil)" at -102.438,-177.046 h1.52
  text "PTH" at -73.237,-177.046 h1.52
  text "Round" at -60.388,-177.046 h1.52
  text "Top Layer - Bottom Layer" at -41.749,-177.046 h1.52
  text "Pad" at -3.66,-177.046 h1.52
  text "Rounded" at 11.322,-177.046 h1.52
  text "c160h87" at 30.265,-177.046 h1.52
  text "6" at 174.269,-178.354 h1.52
  text "Bottom Layer" at 184.68,-178.354 h1.52
  text "0.070mm" at 240.291,-178.354 h1.52
  text "157" at -117.674,-180.856 h1.52
  text "0.300mm (11.81mil)" at -102.438,-180.856 h1.52
  text "PTH" at -73.237,-180.856 h1.52
  text "Round" at -60.388,-180.856 h1.52
  text "Top Layer - Bottom Layer" at -41.749,-180.856 h1.52
  text "Via" at -3.66,-180.856 h1.52
  text "Rounded" at 11.322,-180.856 h1.52
  text "(Mixed)" at 30.265,-180.856 h1.52
  text "Bottom Surface Finish" at 184.68,-181.402 h1.52
  text "Nickel, Gold" at 218.453,-181.402 h1.52
  text "0.002mm" at 240.291,-181.402 h1.52
  text "Bottom Solder" at 184.68,-184.45 h1.52
  text "Solder Resist" at 218.453,-184.45 h1.52
  text "0.010mm" at 240.291,-184.45 h1.52
  text "3.5" at 256.796,-184.45 h1.52
  text "244 Total" at -117.674,-184.666 h1.52
  text "Bottom Overlay" at 184.68,-187.498 h1.52
  text "Total board thickness:" at 174.269,-190.546 h1.52
  text "1.623mm" at 240.291,-190.546 h1.52
  text "H" at 309.399,-219.046 h3.81
  text "H" at -278.507,-219.094 h3.81
  text "P" at -213.85,-224.15 h2.33
  text "r" at -212.65,-224.15 h2.33
  text "o" at -211.9,-224.15 h2.33
  text "j" at -210.85,-224.15 h2.33
  text "e" at -210.25,-224.15 h2.33
  text "c" at -209.35,-224.15 h2.33
  text "t" at -208.45,-224.15 h2.33
  text "S" at -207.55,-224.15 h2.33
  text "u" at -206.35,-224.15 h2.33
  text "n" at -205.3,-224.15 h2.33
  text "r" at -204.25,-224.15 h2.33
  text "i" at -203.5,-224.15 h2.33
  text "d" at -202.9,-224.15 h2.33
  text "e" at -202,-224.15 h2.33
  text "Copyright" at 141.207,-224.426 h2.5
  text ".a_CopyrightDate" at 151.707,-224.426 h2.5
  text "Drawing No:" at 173.207,-224.926 h3
  text ".a_PcbPartNo" at 188.707,-224.926 h4
  text "Title:" at 238.207,-224.926 h3
  text ".a_Title" at 245.207,-224.926 h4
  text "T" at -213.25,-226.4 h2.33
  text "h" at -212.05,-226.4 h2.33
  text "e" at -211,-226.4 h2.33
  text "D" at -209.65,-226.4 h2.33
  text "i" at -208.15,-226.4 h2.33
  text "a" at -207.55,-226.4 h2.33
  text "m" at -206.65,-226.4 h2.33
  text "o" at -205,-226.4 h2.33
  text "n" at -203.95,-226.4 h2.33
  text "d" at -202.9,-226.4 h2.33
  text "UNLESS OTHERWISE SPECIFIED / DIMENSONS AND TOLLERANCES ARE IN / mm AND APPLY TO FINISHED PART" at 85.2,-228.6 h1.52
  text "3" at -215.5,-228.8 h2.33
  text "2" at -214.45,-228.8 h2.33
  text "L" at -212.95,-228.8 h2.33
  text "e" at -211.75,-228.8 h2.33
  text "a" at -210.85,-228.8 h2.33
  text "v" at -209.95,-228.8 h2.33
  text "y" at -208.9,-228.8 h2.33
  text "g" at -207.85,-228.8 h2.33
  text "r" at -206.8,-228.8 h2.33
  text "e" at -206.05,-228.8 h2.33
  text "a" at -205.15,-228.8 h2.33
  text "v" at -204.25,-228.8 h2.33
  text "e" at -203.2,-228.8 h2.33
  text "R" at -201.85,-228.8 h2.33
  text "d" at -200.5,-228.8 h2.33
  text "Altium Designer" at 141.207,-229.426 h2.5
  text ".a_AltiumVer" at 157.707,-229.426 h2.5
  text "Changed by:" at 173.207,-229.426 h2.5
  text ".a_PcbRevAuthor" at 186.207,-229.426 h3
  text "Change Date:" at 208.707,-229.426 h2.5
  text ".a_PcbRevDate" at 222.207,-229.426 h2.5
  text "Drill Drawing" at 238.107,-229.951 h4
  text "B" at -216.1,-231.05 h2.33
  text "r" at -214.75,-231.05 h2.33
  text "o" at -214,-231.05 h2.33
  text "o" at -212.95,-231.05 h2.33
  text "m" at -211.9,-231.05 h2.33
  text "h" at -210.25,-231.05 h2.33
  text "a" at -209.2,-231.05 h2.33
  text "l" at -208.3,-231.05 h2.33
  text "l" at -207.7,-231.05 h2.33
  text "," at -207.1,-231.05 h2.33
  text "S" at -206.2,-231.05 h2.33
  text "h" at -205,-231.05 h2.33
  text "e" at -203.95,-231.05 h2.33
  text "f" at -203.05,-231.05 h2.33
  text "f" at -202.3,-231.05 h2.33
  text "i" at -201.55,-231.05 h2.33
  text "e" at -200.95,-231.05 h2.33
  text "l" at -200.2,-231.05 h2.33
  text "d" at -199.75,-231.05 h2.33
  text "TOLLERANCES ON:" at 98.9,-231.3 h1.52
  text "U" at -214.45,-233.3 h2.33
  text "n" at -212.95,-233.3 h2.33
  text "i" at -211.9,-233.3 h2.33
  text "t" at -211.3,-233.3 h2.33
  text "e" at -210.7,-233.3 h2.33
  text "d" at -209.8,-233.3 h2.33
  text "K" at -208.45,-233.3 h2.33
  text "i" at -206.95,-233.3 h2.33
  text "n" at -206.35,-233.3 h2.33
  text "g" at -205.3,-233.3 h2.33
  text "d" at -204.25,-233.3 h2.33
  text "o" at -203.2,-233.3 h2.33
  text "m" at -202.15,-233.3 h2.33
  text "Size A2" at 141.207,-234.426 h2.5
  text "Change Reason:" at 173.207,-234.426 h2.5
  text ".a_PcbRevReason" at 189.707,-234.426 h2.5
  text "Sheet 1 of 1" at 208.707,-234.426 h2.5
  text "S" at -210.7,-235.55 h2.33
  text "3" at -209.5,-235.55 h2.33
  text "7" at -208,-235.55 h2.33
  text "R" at -206.95,-235.55 h2.33
  text "D" at -205.6,-235.55 h2.33
  text "1 PLACE DEC. / +/- 0.15" at 80.2,-236.2 h1.52
  text "ANGLES / +/- 0.5 DEG." at 121.5,-236.2 h1.52
  text "2 PLACE DEC. / +/- 0.05" at 100.9,-236.3 h1.52
  text "THIS DRAWING REMAINS THE PROPERTY OF PROJECT SUNRIDE. / COPYRIGHT FOR ALL PURPOSES IS VESTED IN PROJECT SUNRIDE. / THE REPRODUCTION OF THIS DRAWING IN WHOLE OR IN PART IS PROHIBITED WITHOUT EXPRESS CONSENT IN WRITING. THIS DESIGN IS OFFERED FOR USE ONLY WITH EQUIPMENT MANUFACTURED OR SPECIFICALLY RECOMMENDED BY PROJECT SUNRIDE. RIGHTS ARE RESERVED TO MAKE A CHARGE FOR THE USE OF THIS DESIGN OR ANY PART THEREOF AND SUCH RIGHT SHALL SUBSIST UNLESS AND UNTIL THE SAME SHALL BE EXPRESSLY WAIVED IN WRITING. ACCEPTANCE OF THIS DRAWING WILL BE CONSTRUED AS AN ACCEPTANCE OF THESE CONDITIONS." at -174.3,-239 h1.52
  text "1" at -251.987,-240.911 h3.81
  text "2" at -194.762,-240.911 h3.81
  text "3" at -139.311,-240.911 h3.81
  text "7" at 102.898,-240.911 h3.81
  text "8" at 161.01,-240.911 h3.81
  text "9" at 218.235,-240.911 h3.81
  text "6" at 43.207,-241.152 h3.81
  text "5" at -14.864,-241.283 h3.81
  text "10" at 274.573,-241.354 h3.81
  text "4" at -74.988,-241.798 h3.81

## Dimensions
-65,-35 to 35,-35 on Drill Drawing
-65,65 to -65,-35 on Drill Drawing

## Text inside footprints (layer, text, board x,y; h text height)
J2: Top Overlay "1" at 12.6,0.4 h0.7 r180; Top Overlay "6" at 27.9,0.4 h0.7 r180
J3A: Top Overlay "2" at 1.175,-16.337 h0.7 r270; Top Overlay "1" at 1.175,-7.337 h0.7 r270
J3B: Top Overlay "1" at -12.05,-3.39 h0.7 r270; Top Overlay "2" at -12.05,-12.39 h0.7 r270
J3C: Top Overlay "2" at -0.2,16.34 h0.7 r90; Top Overlay "1" at -0.2,7.34 h0.7 r90
J3D: Top Overlay "2" at -12.2,11.8 h0.7 r90; Top Overlay "1" at -12.2,2.8 h0.7 r90
J6: Top Overlay "1" at -43.8,23.2 h0.7 r90; Top Overlay "6" at -43.8,7.9 h0.7 r90
J7A: Top Overlay "1" at -51.4,-18.3 h0.7; Top Overlay "4" at -62.6,-18.3 h0.7
J7B: Top Overlay "4" at -62.5,-2.2 h0.7; Top Overlay "1" at -51.3,-2.2 h0.7
J9: Top Overlay "4" at -62,9.8 h0.7 r90; Top Overlay "1" at -62,21 h0.7 r90
J10: Top Overlay "3" at -63.3,29.4 h0.7; Top Overlay "1" at -54.1,29.4 h0.7